# EAGLE board unoshield-v5 (EAGLE 8.7.1)
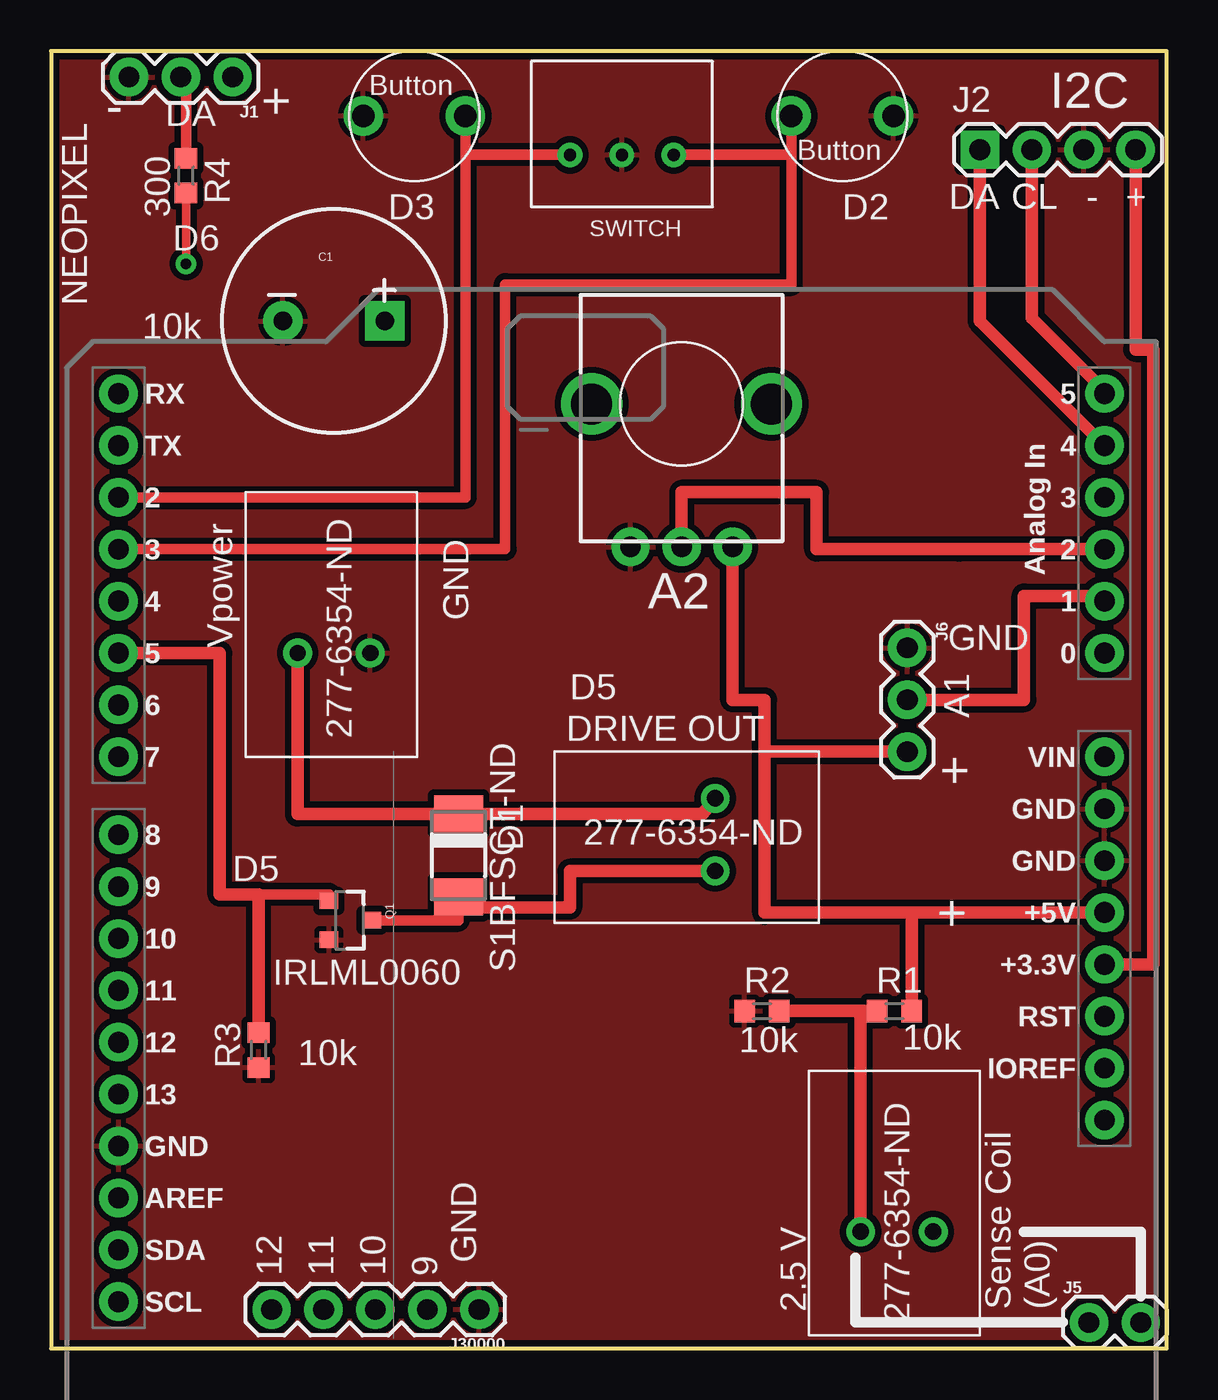
[diagram p0: board, top side]
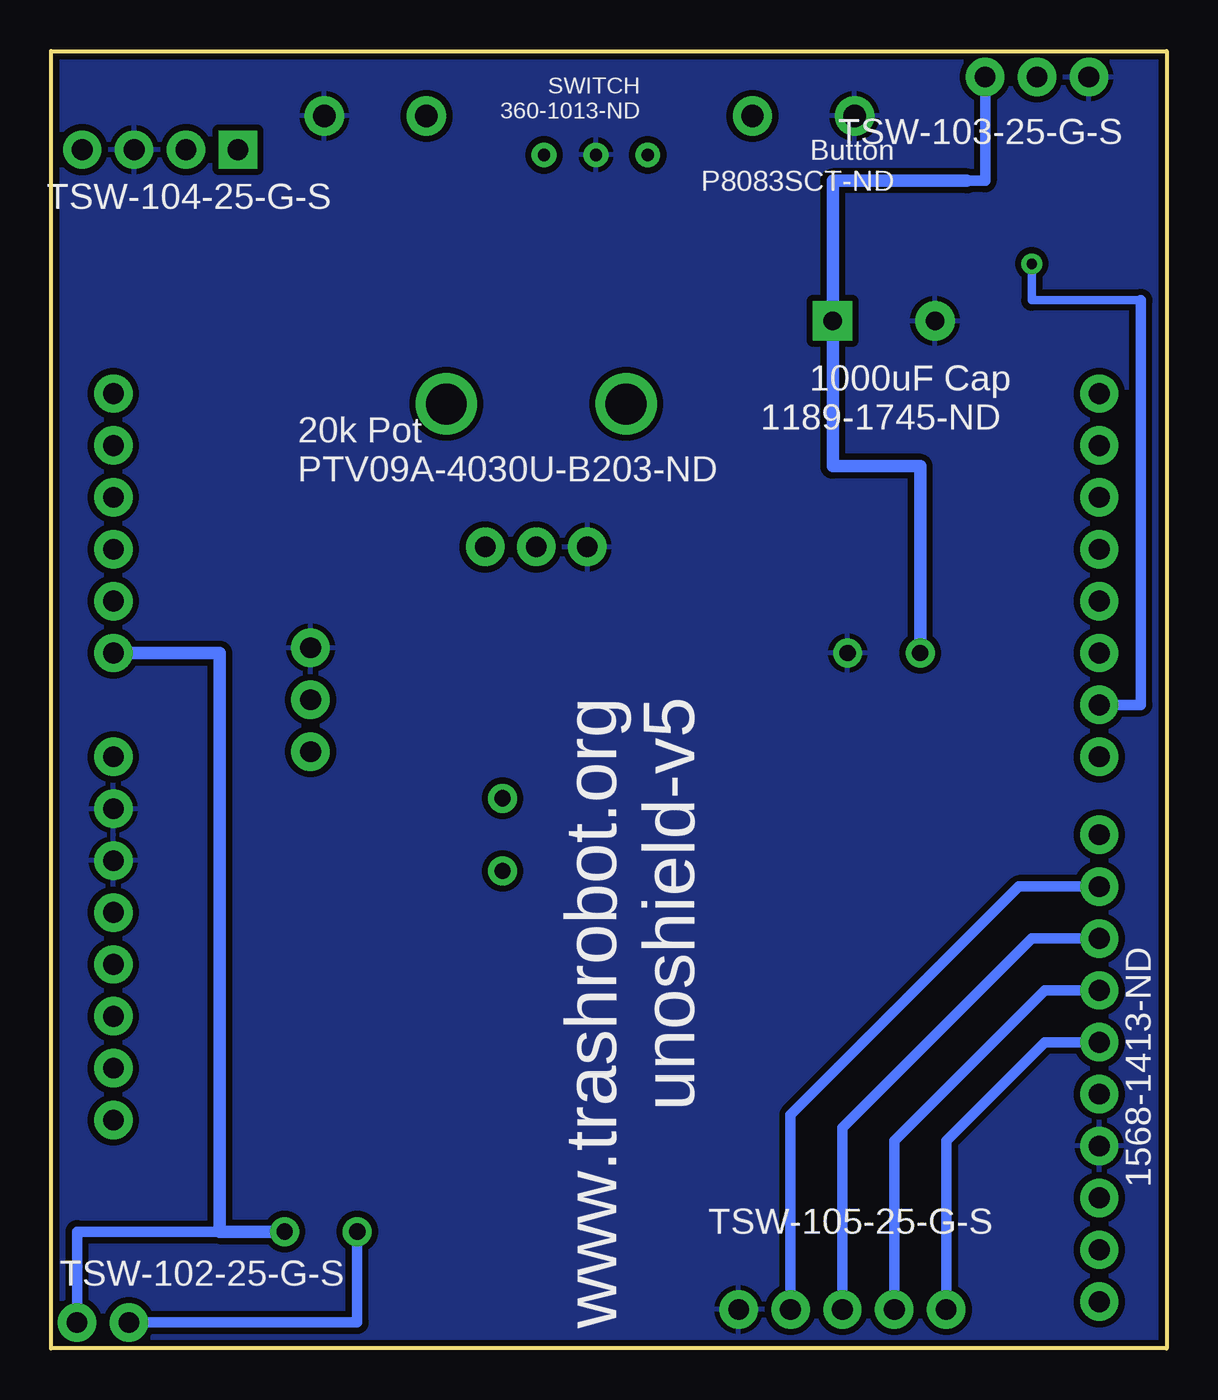
[diagram p1: board, bottom side, seen from below]

Size 54.61 x 63.5 mm. Coordinates in mm from the lower left corner, seen from the top.
Outline: 0,63.5 0,0 54.61,0 54.61,63.5 0,63.5
Copper layers (1*16): Top 0.035mm / dielectric 1.5mm / Bottom 0.035mm
Design rules "default": minimum track width 8mil, minimum drill 20mil, track to track 8mil, track to pad 8mil, pad to pad 8mil, via to via 8mil, smd to smd 8mil, copper to edge 10mil, drill to drill 8mil, minimum pad ring 12mil, minimum via ring 10mil, stop-mask expansion 4mil, vias tented up to drill 25mil, thermal gap 10mil
Net classes: 0 default: width 0.203 mm; 1 vcc: width 0.254 mm

## Footprints (pad centres in the part's own frame; a part is rotated, then mirrored left to right if it is on the bottom)
CPOL-RADIAL-1000UF-25V-KIT = drill 0.9 pad 1.93 square: + 2.5,0 | drill 0.9 pad 1.93: - -2.5,0
DO-214AC = smd 1.8 x 2.4: A 2.025,0; C -2.025,0
1X03 = drill 1.016 pad 1.88: 1 0,0; 2 2.54,0; 3 5.08,0
1X04 = drill 1.016 pad 1.88 square: 1 0,0 | drill 1.016 pad 1.88: 2 2.54,0; 3 5.08,0; 4 7.62,0
UNO_R3_SHIELD = drill 1.016 pad 1.88: 3.3V 50.8,26.67; 5V 50.8,29.21; A0 50.8,41.91; A1 50.8,44.45; A2 50.8,46.99; A3 50.8,49.53; A4 50.8,52.07; A5 50.8,54.61; AREF 2.54,15.24; D2 2.54,49.53; D3 2.54,46.99; D4 2.54,44.45; D5 2.54,41.91; D6 2.54,39.37; D7 2.54,36.83; D8 2.54,33.02; D9 2.54,30.48; D10 2.54,27.94; D11 2.54,25.4; D12 2.54,22.86; D13 2.54,20.32; GND@0 50.8,31.75; GND@1 50.8,34.29; GND@2 2.54,17.78; IOREF 50.8,21.59; NC 50.8,19.05; RES 50.8,24.13; RX 2.54,54.61; SCL 2.54,10.16; SDA 2.54,12.7; TX 2.54,52.07; VIN 50.8,36.83
1X02 = drill 1.016 pad 1.88: 1 0,0; 2 2.54,0
1X05 = drill 1.016 pad 1.88: 1 0,0; 2 2.54,0; 3 5.08,0; 4 7.62,0; 5 10.16,0
SOT-23 = smd 0.8 x 0.9: 1 -0.95,-1; 2 0.95,-1; 3 0,1.1
R0603 = smd 1 x 1.1: 1 -0.85,0; 2 0.85,0
ALPS_POT_KIT = drill 1 pad 1.88: P$1 7,-2.5; P$2 7,0; P$3 7,2.5 | drill 2: P$4 0,-4.4; P$5 0,4.4
BUTTON = drill 1.1 pad 1.93: P$1 -2.499,0; P$2 2.499,0
360-1013-ND = drill 0.6: CENTER 0,0; LEFT -2.54,0; RIGHT 2.54,0
SPRING-TERMINAL = drill 0.8: P$1 5.08,1.778; P$2 5.08,5.334

## Placement (x,y rotation side)
C1  1000uf/25V  [CPOL-RADIAL-1000UF-25V-KIT]  13.84,50.29 0 top
D1  [DO-214AC]  19.94,24.13 270 top
J1  455-1750-1-ND  [1X03]  8.89,62.23 180 top
J2  [1X04]  45.47,58.67 0 top
J4  ARDUINO_R3_SHIELD  [UNO_R3_SHIELD]  0.76,-7.87 0 top
J5  [1X02]  50.8,1.27 0 top
J6  455-1750-1-ND  [1X03]  41.91,34.29 270 top
J30000  [1X05]  20.95,1.91 180 top
Q1  IRLML0060  [SOT-23]  14.61,20.95 270 top
R1  10k  [R0603]  41.28,16.51 0 top
R2  10k  [R0603]  34.8,16.51 0 top
R3  10k  [R0603]  10.16,14.61 90 top
R4  330  [R0603]  6.6,57.4 270 top
R5  20k  [ALPS_POT_KIT]  30.86,46.23 270 top
SW1  BUTTON  [BUTTON]  17.78,60.33 180 top
SW2  BUTTON  [BUTTON]  38.74,60.33 0 top
SW3  ON-OFF-ON-360-1013-ND  [360-1013-ND]  27.94,58.42 0 top
X1  SPRING-TERMINAL  [SPRING-TERMINAL]  17.4,28.96 90 top
X2  SPRING-TERMINAL  [SPRING-TERMINAL]  44.96,0.64 90 top
X3  SPRING-TERMINAL  [SPRING-TERMINAL]  37.59,28.7 180 top

## Library data of the parts
C1 = SparkFun-Capacitors; PROD_ID: CAP-09538
D1 = diode
J1 J6 = SparkFun-Connectors; PROD_ID: XXX-00000
J2 J5 J30000 = SparkFun-Connectors
J4 = SparkFun-Boards
Q1 SW1-SW3 X1-X3 = spietz-library
R1-R4 = resistor
R5 = SparkFun-Electromechanical

## Nets
5V: J4.5V J6.3 R1.2 R5.P$3
BUTTON: J4.D3 SW2.P$1 SW3.RIGHT
CL: J2.2 J4.A5
DA: J2.1 J4.A4
GND: C1.- J1.3 J2.3 J4.GND@0 J4.GND@1 J4.GND@2 J6.1 J30000.1 Q1.2 R2.1 R3.1 R5.P$1 SW1.P$2 SW2.P$2 SW3.CENTER X1.P$1
N$1: J4.D5 Q1.1 R3.2
N$4: J4.D6 R4.2
N$5: J5.1 R1.1 R2.2 X2.P$2
N$6: J4.A1 J6.2
N$7: J4.D12 J30000.5
N$8: D1.A Q1.3 X3.P$2
N$9: J4.D11 J30000.4
N$10: J4.D10 J30000.3
N$11: J4.D9 J30000.2
N$12: J4.D2 SW1.P$1 SW3.LEFT
N$23: J4.A0 J5.2 X2.P$1
N$25: J1.2 R4.1
N$28: J4.A2 R5.P$2
VCC: J2.4 J4.3.3V
VIN: C1.+ D1.C J1.1 X1.P$2 X3.P$1

## Tracks (layer width: path | path; a pad name or v marks a point on that pad's centre or on a via)
5V
  Top 0.61: J4.5V 42.12,21.34 | 42.12,21.34 R1.2 | R5.P$3 33.36,31.75 34.93,31.75 34.93,29.21 | 42.12,21.34 34.93,21.34 34.93,29.21 | 34.93,29.21 J6.3
BUTTON
  Top 0.508: J4.D3 22.22,39.12 22.22,52.07 36.24,52.07 36.24,58.42 | 36.24,58.42 SW2.P$1 | SW3.RIGHT 36.24,58.42
CL
  Top 0.61: J2.2 48.01,50.42 51.69,46.74 | 52.07,46.35 51.69,46.74 | 51.69,46.74 J4.A5
  Bottom 0.61: 51.31,46.99 J4.A5
DA
  Top 0.61: J2.1 45.47,50.29 J4.A4
GND
  pour Top (isolate 0.305): -1.27,65.41 55.88,65.41 55.88,-0.64 -1.27,-0.64
  pour Bottom (isolate 0.305): -2.54,67.31 56.52,67.31 56.52,-1.91 -2.54,-1.91
N$1
  Top 0.508: Q1.1 13.61,22.23 10.16,22.23
  Top 0.61: J4.D5 8.26,34.04 8.26,22.23 10.16,22.23 R3.2
N$4  (via drill 0.5)
  Top 0.406: R4.2 v6.6,53.09
  Bottom 0.406: v6.6,53.09 6.6,51.31 1.27,51.31
  Bottom 0.508: J4.D6 1.27,31.5 1.27,51.31
N$5
  Top 0.61: X2.P$2 39.62,16.51 | 39.62,16.51 R2.2 | R1.1 39.62,16.51
  Bottom 0.508: J5.1 39.62,1.27 X2.P$2
N$6
  Top 0.61: J4.A1 51.56,36.83 47.62,36.83 47.62,31.75 J6.2
N$7
  Bottom 0.508: J4.D12 5.97,14.99 10.79,10.16 10.79,2.54 11.43,1.91 J30000.5
N$8
  Top 0.508: Q1.3 19.94,20.95 D1.A
  Top 0.61: 19.89,22.11 D1.A 19.68,22.11 20.95,21.59 25.4,21.59 25.4,23.37 X3.P$2
N$9
  Bottom 0.508: J4.D11 5.97,17.53 13.33,10.16 J30000.4
N$10
  Bottom 0.508: J4.D10 6.6,20.07 15.88,10.79 J30000.3
N$11
  Bottom 0.508: J4.D9 7.24,22.61 18.41,11.43 J30000.2
N$12
  Top 0.508: J4.D2 20.28,41.66 20.28,58.42 | 20.28,58.42 SW1.P$1 | SW3.LEFT 20.28,58.42
N$23
  Bottom 0.508: J5.2 53.34,5.71 46.36,5.71
  Bottom 0.61: J4.A0 46.36,34.04 46.36,5.71 X2.P$1
N$25
  Top 0.508: R4.1 6.6,62.23 J1.2
N$28
  Top 0.152: 44.2,39.37 44.45,39.12
  Top 0.61: J4.A2 44.45,39.12 37.47,39.12 37.47,41.91 30.86,41.91 R5.P$2
VCC
  Top 0.61: J2.4 53.09,48.9 53.95,48.9 53.95,18.8 J4.3.3V
VIN
  Top 0.61: X3.P$1 31.88,26.16 D1.C 12.06,26.16 X1.P$2
  Bottom 0.508: J1.1 8.89,57.15 9.78,57.15
  Bottom 0.61: X1.P$2 12.06,43.18 16.34,43.18 C1.+ 16.34,57.15 9.78,57.15

## Text on the board
tPlace: Button | I2C | - | DA | + | Button | D3 | D2 | DA | CL | - | + | 300 | D6 | SWITCH | NEOPIXEL | 10k | 277-6354-ND | Vpower | GND | A2 | GND | D5 | DRIVE OUT | A1 | + | 277-6354-ND | D5 | + | IRLML0060 | S1BFSCT-ND | 10k | 10k | 10k | 277-6354-ND | 2.5 V | 12 | 11 | 10 | 9 | GND | Sense Coil / (A0)
bPlace: SWITCH / 360-1013-ND | TSW-103-25-G-S | Button / P8083SCT-ND | TSW-104-25-G-S | 1000uF Cap / 1189-1745-ND | 20k Pot / PTV09A-4030U-B203-ND | www.trashrobot.org / unoshield-v5 | 1568-1413-ND | TSW-105-25-G-S | TSW-102-25-G-S
tValues: Tent Vias! | Arduino Wee v1.3